# Altium PCB Main_Layout.PcbDoc
Units mil, origin at the board's own origin, x right, y up, seen from the top; angles counter-clockwise.
Board outline 1250 x 2200 mil, 2 copper layers (Top Layer, Bottom Layer), stack 62.8 mil thick; 25 components, 37 nets, 162 pads, 25 vias.
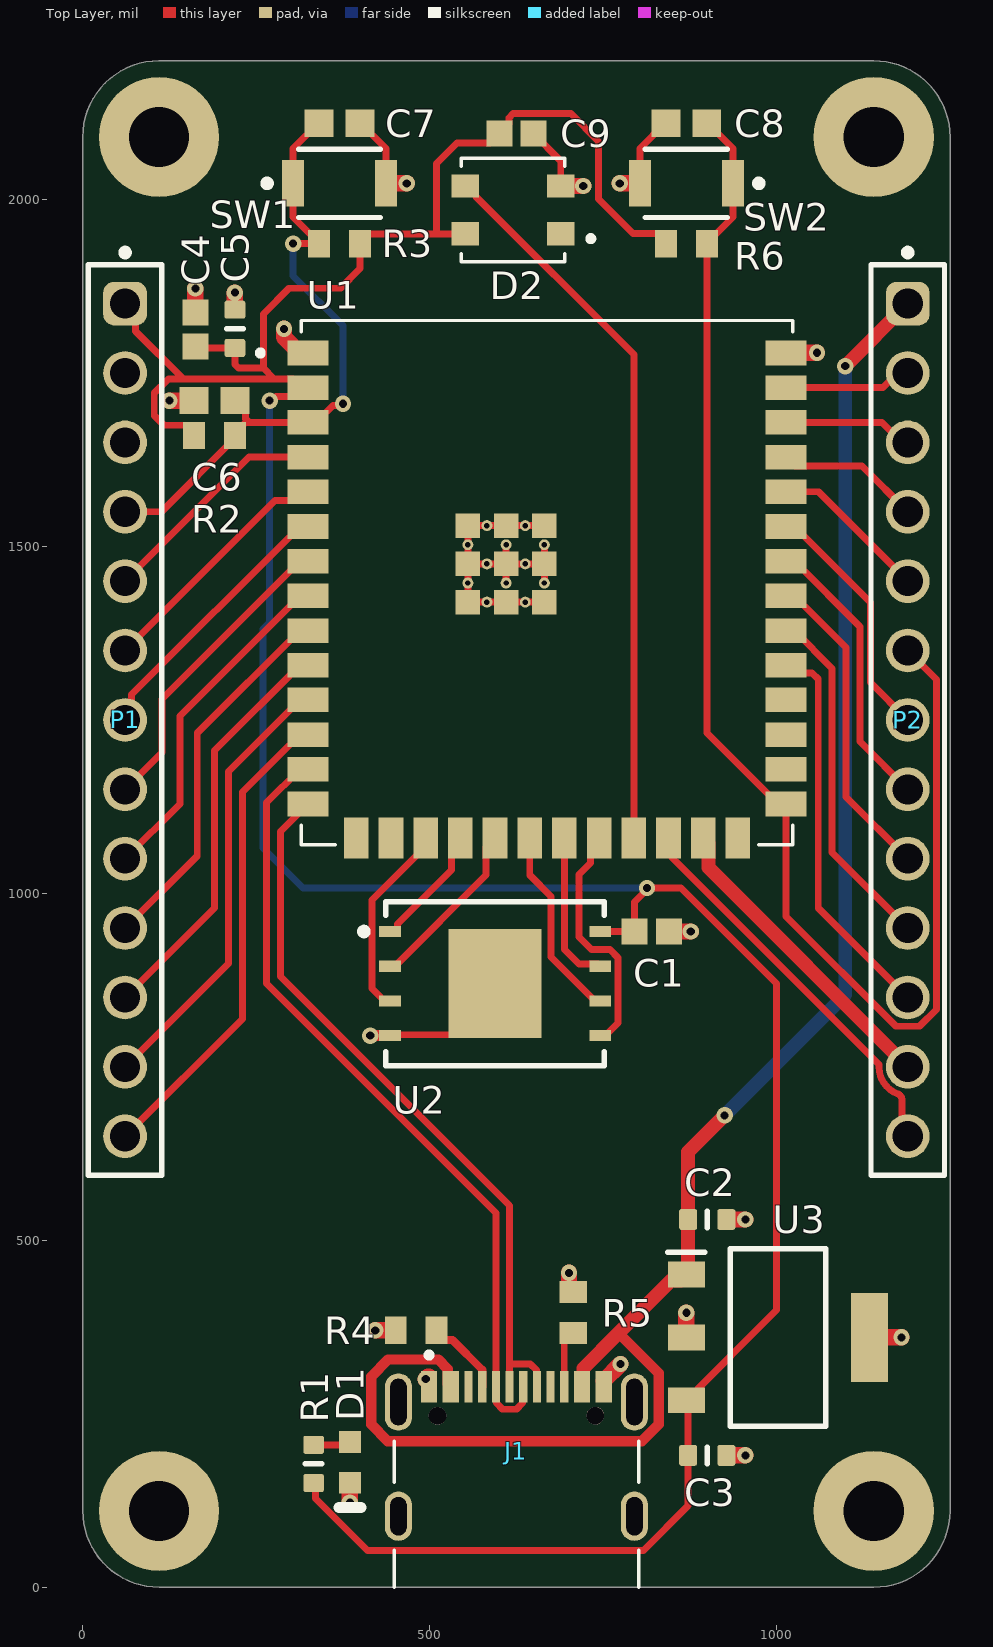
[diagram p0: Top Layer view]
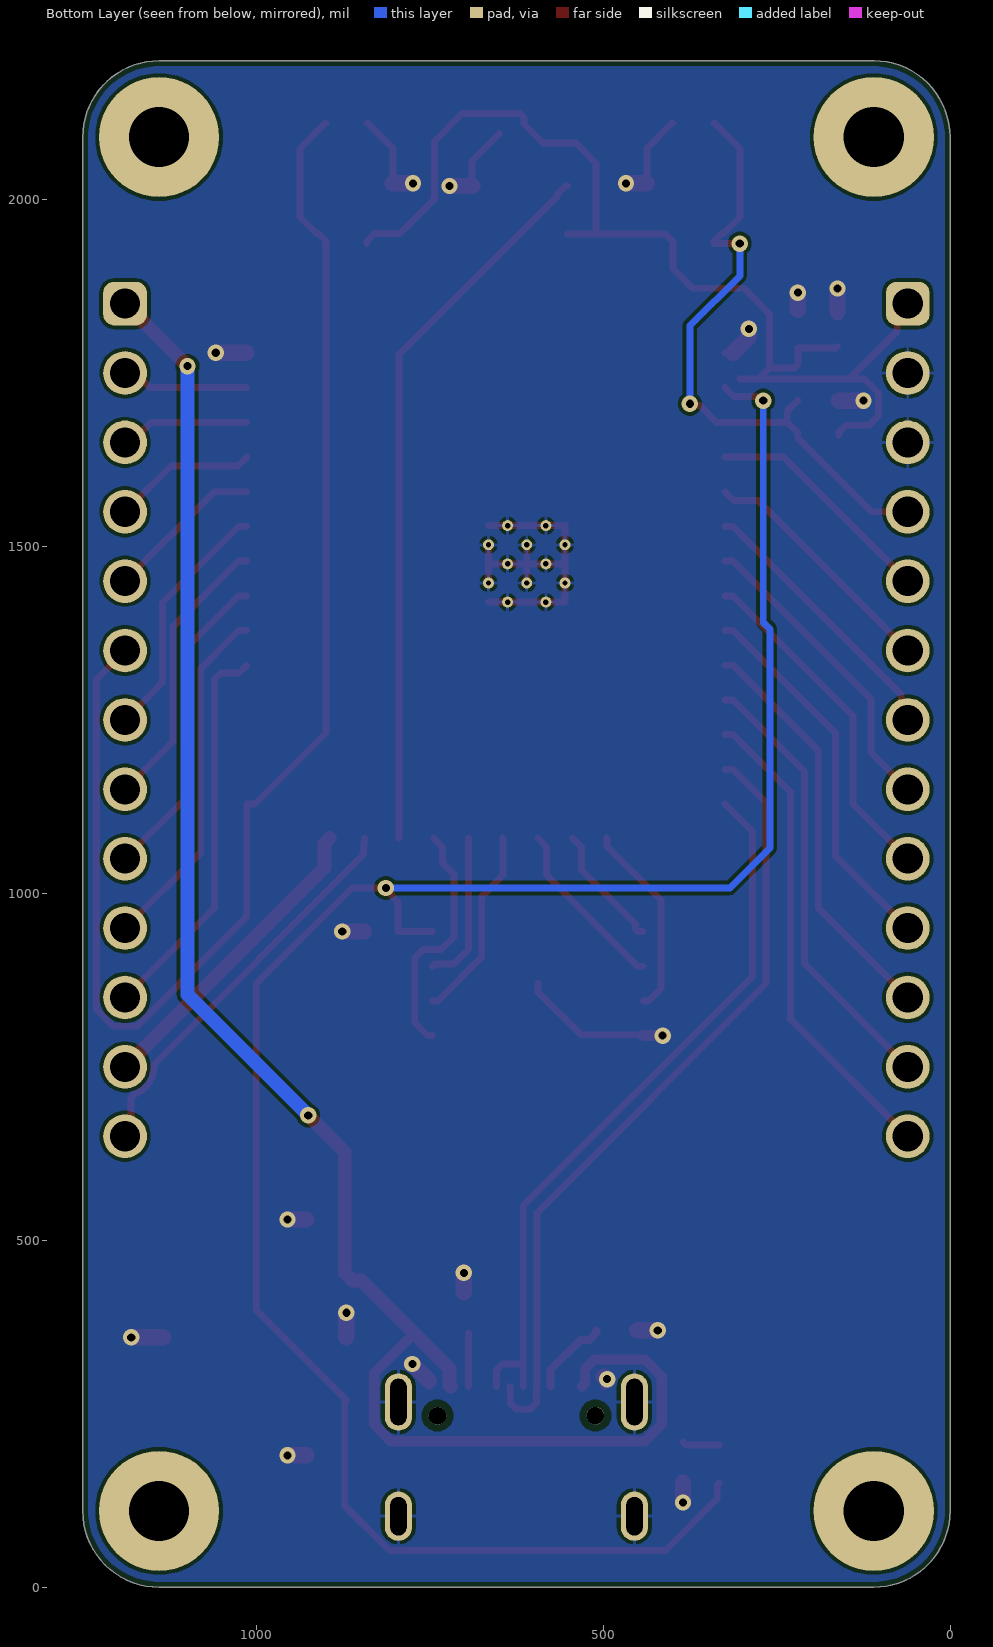
[diagram p1: Bottom Layer view, seen from below]
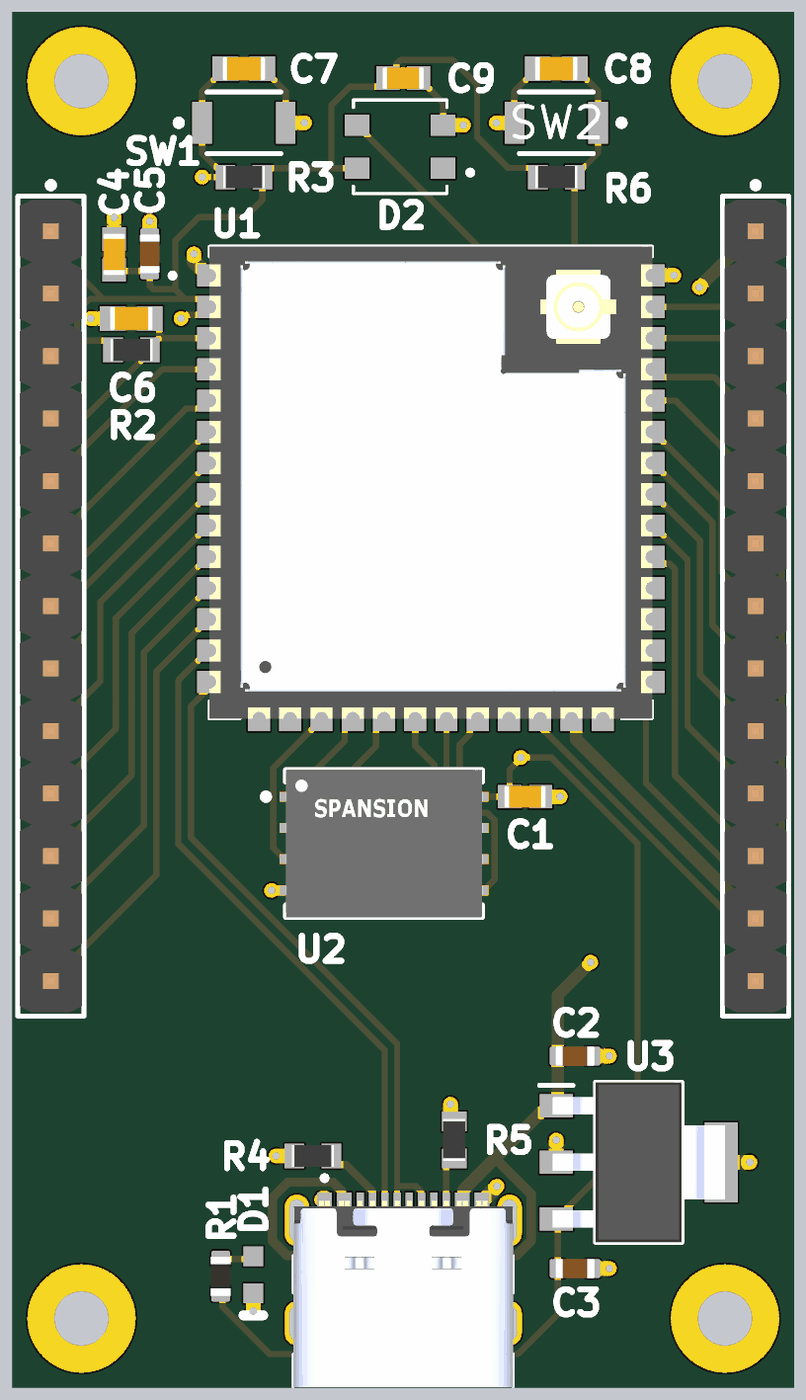
[diagram p2: 3D render of the assembled board from above, using the file's embedded part models]

## Layer stack, top to bottom
Top Solder: solder mask 0.4, Solder Resist, Dk 3.8
Top Layer: signal copper 1.4
Dielectric 1: dielectric 60, FR-4, Dk 4.5
Bottom Layer: signal copper 1.4
Bottom Solder: solder mask 0.4, Solder Resist, Dk 3.8

## Board outline
0,110 0,2090 cw(c110,2090) 110,2200 1140,2200 cw(c1140,2090) 1250,2090 1250,110 cw(c1140,110) 1140,0 110,0 cw(c110,110)

## Design rules (kind name [scope] priority, off if disabled: settings)
BoardOutlineClearance [All] p1: gap=7.87 ignorepadtopadclearanceinfootprint=FALSE
Clearance [All] p1: gap=5 ignorepadtopadclearanceinfootprint=FALSE except(9.84: Arc-Hole Track-Hole SMDPad-Hole THPad-Hole Via-Hole Fill-Hole Poly-Hole Region-Hole Text-Hole)
ComponentClearance [All] p1: gap=5 collisioncheckmode=3 verticalgap=5 showdistances=TRUE
DiffPairsRouting [All] p1: maxlimit=10 minlimit=5 mostfreqgap=5 toplayer_minwidth=5 toplayer_maxwidth=1000 toplayer_prefwidth=5 bottomlayer_minwidth=5 bottomlayer_maxwidth=1000 bottomlayer_prefwidth=5 maxuncoupledlength=500
Height [All] p1: minheight=0 maxheight=71497.94 prefheight=500
HoleSize [All] p1: absolutevalues=TRUE maxlimit=248.03 minlimit=11.81 maxpercent=80.000 minpercent=20.000
HoleToHoleClearance [All] p1: gap=9.84 allowstackedmicrovias=FALSE
MinimumAnnularRing [All] p1: minimumring=3
MinimumSolderMaskSliver [All] p1: minsoldermaskwidth=0
PlaneClearance [All] p1: clearance=5
PlaneConnect PlaneConnectPowerPads [InPadClass('PowerPads')] p1: planeconnectstyle=Direct reliefexpansion=20 reliefentries=4 reliefconductorwidth=10 reliefairgap=10
PlaneConnect [All] p2: pad.planeconnectstyle=Relief pad.reliefexpansion=11.81 pad.reliefentries=4 pad.reliefconductorwidth=5 pad.reliefairgap=5 via.planeconnectstyle=Direct via.reliefexpansion=11.81 via.reliefentries=4 via.reliefconductorwidth=5 via.reliefairgap=5
PolygonConnect PolygonConnectPowerPads [All vs (InPadClass('PowerPads'))] p1: connectstyle=Direct reliefconductorwidth=10 reliefentries=4 polygonreliefangle="90 Angle" airgapwidth=10
PolygonConnect [All] p2: thpad.connectstyle=Relief thpad.reliefconductorwidth=5 thpad.reliefentries=4 thpad.polygonreliefangle="90 Angle" thpad.airgapwidth=5 smdpad.connectstyle=Relief smdpad.reliefconductorwidth=5 smdpad.reliefentries=4 smdpad.polygonreliefangle="90 Angle" smdpad.airgapwidth=5 via.connectstyle=Direct via.reliefconductorwidth=5 via.reliefentries=4 via.polygonreliefangle="90 Angle" via.airgapwidth=5
RoutingVias [All] p1: holewidth=11.81 width=23.62 viastyle="Through Hole" minholewidth=11.81 minwidth=23.62 maxholewidth=23.62 maxwidth=259.84
SilkToSilkClearance [All] p1: silktosilkclearance=0
SilkToSolderMaskClearance [IsPad] p1: minsilkscreentomaskgap=5 clearancetoexposedcopper=TRUE
SolderMaskExpansion [All] p1: expansion=2.95 istentingtop=FALSE
SupplyNets "Schematic Supply Nets_2" [InNet('VBUS')] p1: voltage=0.000
SupplyNets "Schematic Supply Nets_1" [InNet('GND')] p2: voltage=0.000
SupplyNets "Schematic Supply Nets" [InNet('+3.3V')] p3: voltage=0.000
Width [All] p1: maxlimit=1000 minlimit=5 preferedwidth=5 minimp=50.000000 maximp=50.000000 favimp=50.000000
20 further rules are at their usual default settings.

## Classes and differential pairs
component class Main_Schematic: C1 C2 C3 C4 C5 C6 C7 C8 C9 D1 D2 P1 P2 R1 R3 R4 R5 R6 SW1 SW2 U2 U3

## Components (designator, comment, footprint, x,y, rotation, side; value= is the part's Value field where it differs from the comment)
C1 "Capacitor 100 nF +/-10% 50 V 0603" CAPC1608X90X40NL10T20 820,945 r180 top value=100nF
C2 "Capacitor 10µF +/-20% 10V 0603" CAPC0603(1608)100_L 900,530 r0 top value=10µF
C3 "Capacitor 10µF +/-20% 10V 0603" CAPC0603(1608)100_L 900,190 r0 top value=22µF
C4 "Capacitor 100 nF +/-10% 50 V 0603" CAPC1608X90X40NL10T20 162.29,1812.71 r90 top value=100nF
C5 "Capacitor 22µF +/-20% 10V 0603" CAPC0603(1608)100_L 219.29,1813.7 r90 top value=22µF
C6 "Capacitor 1 uF +/- 10% 16 V 0603" CAPC1608X94X35NL15T15 189.75,1710.29 r180 top value=1µF
C7 "Capacitor 1 uF +/- 10% 16 V 0603" CAPC1608X94X35NL15T15 370,2110 r0 top value=1µF
C8 "Capacitor 1 uF +/- 10% 16 V 0603" CAPC1608X94X35NL15T15 870,2110 r180 top value=1µF
C9 "Capacitor 100 nF +/-10% 50 V 0603" CAPC1608X90X40NL10T20 625,2095 r0 top value=100nF
D1 "LTST-C190GKT" LTST-C190GKT_V 385,180 r270 top
D2 "2659" 2659 620,1985 r180 top
J1 "UJ20-C-H-G-SMT-1-P16-TR" SAMESKY_UJ20-C-H-G-SMT-1-P16-TR 625,0 r0 top
P1 "61301311121" 61301311121 61,1250 r270 top
P2 "61301311121" 61301311121 1189,1250 r270 top
R1 "Resistor 120R +/-5 % 0603 0.1 W" RESC0603(1608)_L 332.76,177.7 r270 top value=120
R2 "Resistor 10k +/-1% 0603 100 mW" RESC1608X55X25ML10T15 190,1660 r180 top value=10k
R3 "Resistor 10k +/-1% 0603 100 mW" RESC1608X55X25ML10T15 370,1936.5 r0 top value=10k
R4 "Resistor 4k7 +/-1% 0603 100 mW" RESC1608X55X25ML10T15 480.51,370.16 r180 top value=5.1k
R5 "Resistor 4k7 +/-1% 0603 100 mW" RESC1608X55X25ML10T15 706.69,395.75 r90 top value=5.1k
R6 "Resistor 10k +/-1% 0603 100 mW" RESC1608X55X25ML10T15 870,1936.5 r180 top value=10k
SW1 "B3U-1000P" OMRON-B3U-1000_V 370,2023.32 r0 top
SW2 "B3U-1000P" OMRON-B3U-1000_V 870,2023.32 r180 top
U1 "ESP32-S3-WROOM-1U-N16" XCVR_ESP32-S3-WROOM-1U-N16 669.17,1447.72 r0 top
U2 "S25HL512TDPNHI010" SON127P800X600X80-9N-V1 594.17,870 r0 top
U3 "AZ1117CH2-3.3TRG1" SOT230P700X180-4N 1001.89,360 r0 top

## Footprints (in the part's own frame and the unit in brackets; to place one, negate y for a bottom-side part, rotate by r counter-clockwise, add the part's x,y. Pads: shape width x height; smd on the part's side, far side on the other; paste and mask are expansions set on the pad)
2659 [mm]
  rect 1x0.85 smd: 1(-1.75,0.875) 2(-1.75,-0.875) 3(1.75,-0.875) 4(1.75,0.875)
  silkscreen extent -2.95,-1.9 1.9,1.9
61301311121 [mm] "Pin Header, pitch 2.54 mm, THT, Vertical, single row, 13p"
  rrect50% 1.6x1.6 hole 1.1: 1(-15.24,0)
  round 1.6 hole 1.1: 2(-12.7,0) 3(-10.16,0) 4(-7.62,0) 5(-5.08,0) 6(-2.54,0) 7(0,0) 8(2.54,0) 9(5.08,0) 10(7.62,0) 11(10.16,0) 12(12.7,0) 13(15.24,0)
  silkscreen extent -17.23,-1.35 16.66,1.35, body extent -16.51,-1.27 16.51,1.27, height 8.57
CAPC0603(1608)100_L [mm] "Chip Capacitor, Body 1.6x0.8mm, Height 1.0mm, IPC High Density"
  rrect25% 0.66x0.76 smd: 1(-0.7,0) 2(0.7,0)
  silkscreen extent 0,-0.3 0,0.3, body extent -0.8,-0.4 0.8,0.4, height 0.95
CAPC1608X90X40NL10T20 [mm] "Chip Capacitor, 2-Leads, Body 1.70x0.90mm, IPC Medium Density"
  rect 0.95x0.95 smd: 1(-0.625,0) 2(0.625,0)
  body extent -0.85,-0.45 0.85,0.45, height 0.9
CAPC1608X94X35NL15T15 [mm] "Chip Capacitor, 2-Leads, Body 1.75x0.96mm, IPC Medium Density"
  rect 1.05x1 smd: 1(-0.75,0) 2(0.75,0)
  body extent -0.87,-0.48 0.87,0.48, height 0.94
LTST-C190GKT_V [mm] "SMD, 2-Leads, Body 1.6x0.8mm"
  rect 0.8x0.8 smd: 1(-0.75,0) 2(0.75,0)
  silkscreen extent 1.65,-0.4 1.65,0.4, body extent -0.8,-0.4 0.8,0.4, height 0.9
OMRON-B3U-1000_V [mm] "SMD, 2-Leads, Body 3x2.5mm"
  rect 0.8x1.7 smd: 1(-1.7,0) 2(1.7,0)
  silkscreen extent -2.77,-1.25 1.5,1.25, body extent -1.5,-1.25 1.5,1.25, height 1.75
RESC0603(1608)_L [mm] "Chip Resistor, Body 1.6x0.8mm, IPC High Density"
  rrect25% 0.66x0.76 smd: 1(-0.7,0) 2(0.7,0)
  silkscreen extent 0,-0.3 0,0.3, body extent -0.8,-0.4 0.8,0.4, height 0.45
RESC1608X55X25ML10T15 [mm] "Chip Resistor, 2-Leads, Body 1.70x0.90mm, IPC Low Density"
  rect 0.8x1 smd: 1(-0.75,0) 2(0.75,0)
  body extent -0.85,-0.45 0.85,0.45, height 0.55
SAMESKY_UJ20-C-H-G-SMT-1-P16-TR [mm]
  rect 0.6x1.15 smd: A1_B12(-3.2,7.345) A4_B9(-2.4,7.345) B1_A12(3.2,7.345) B4_A9(2.4,7.345)
  rect 0.3x1.15 smd: A5(-1.25,7.345) A6(-0.25,7.345) A7(0.25,7.345) A8(1.25,7.345) B5(1.75,7.345) B6(0.75,7.345) B7(-0.75,7.345) B8(-1.75,7.345)
  oval 1x2.1 hole 0.6 slot 1.7 at 90 deg: SH1(-4.32,6.78) SH2(4.32,6.78)
  oval 1x1.8 hole 0.6 slot 1.4 at 90 deg: SH3(-4.32,2.6) SH4(4.32,2.6)
  round 0.65 hole 0.65 unplated: ""(-2.89,6.28) ""(2.89,6.28)
  silkscreen extent -4.47,0 4.47,8.6, body extent -4.47,0 4.47,7.6, height 3.31
SON127P800X600X80-9N-V1 [mm] "SON,1.27mm,pitch;8 pin,8.00mm W X 6.00mm L X 0.80mm H body (w/thermal tab)"
  rect 0.8x0.41 smd paste-0.02 mask+0: 1(-3.85,1.905) 2(-3.85,0.635) 3(-3.85,-0.635) 4(-3.85,-1.905) 5(3.85,-1.905) 6(3.85,-0.635) 7(3.85,0.635) 8(3.85,1.905)
  rect 3.4x4 smd paste-1.7 mask+0: 9(0,0)
  silkscreen extent -4.92,-3 4,3, body extent -4,-3 4,3, height 0.8
SOT230P700X180-4N [mm]
  rect 1.35x0.95 smd: 1(-3.35,2.3) 2(-3.35,0) 3(-3.35,-2.3)
  rect 1.35x3.25 smd: 4(3.35,0)
  silkscreen extent -4.03,-3.25 1.75,3.25, body extent -3.5,-3.25 3.5,3.25, height 1.65
XCVR_ESP32-S3-WROOM-1U-N16 [mm]
  rect 1.5x0.9 smd: 1(-8.75,8.41) 2(-8.75,7.14) 3(-8.75,5.87) 4(-8.75,4.6) 5(-8.75,3.33) 6(-8.75,2.06) 7(-8.75,0.79) 8(-8.75,-0.48) 9(-8.75,-1.75) 10(-8.75,-3.02) 11(-8.75,-4.29) 12(-8.75,-5.56) 13(-8.75,-6.83) 14(-8.75,-8.1) 27(8.75,-8.1) 28(8.75,-6.83) 29(8.75,-5.56) 30(8.75,-4.29) 31(8.75,-3.02) 32(8.75,-1.75) 33(8.75,-0.48) 34(8.75,0.79) 35(8.75,2.06) 36(8.75,3.33) 37(8.75,4.6) 38(8.75,5.87) 39(8.75,7.14) 40(8.75,8.41)
  rect 0.9x1.5 smd: 15(-6.985,-9.35) 16(-5.715,-9.35) 17(-4.445,-9.35) 18(-3.175,-9.35) 19(-1.905,-9.35) 20(-0.635,-9.35) 21(0.635,-9.35) 22(1.905,-9.35) 23(3.175,-9.35) 24(4.445,-9.35) 25(5.715,-9.35) 26(6.985,-9.35)
  rect 0.9x0.9 smd: 41_1(-2.9,2.09) 41_2(-1.5,2.09) 41_3(-0.1,2.09) 41_4(-2.9,0.69) 41_5(-1.5,0.69) 41_6(-0.1,0.69) 41_7(-2.9,-0.71) 41_8(-1.5,-0.71) 41_9(-0.1,-0.71)
  round 0.4 hole 0.2 mask+0: 41_10(-2.2,2.09) 41_11(-0.8,2.09) 41_12(-2.9,1.39) 41_13(-1.5,1.39) 41_14(-0.1,1.39) 41_15(-2.2,0.69) 41_16(-0.8,0.69) 41_17(-2.9,-0.01) 41_18(-1.5,-0.01) 41_19(-0.1,-0.01) 41_20(-2.2,-0.71) 41_21(-0.8,-0.71)
  silkscreen extent -10.6,-9.6 9,9.6, body extent -9,-9.6 9,9.6, height 3.35

## Part data
C1 C4 C9: library part CMP-001-00017-6, "Chip Capacitor, 100 nF, +/- 10%, 50 V, 0603 (1608 Metric)", Capacitor Type=Ceramic, Case/Package=0603, Max Operating Temperature=125°C, Min Operating Temperature=-55°C, Tolerance=10%, Voltage Rating=50V, Mounting Technology=SM, Pins=2, RoHS Compliant=True
C2 C3: library part CMP-001-00075-4, "Chip Capacitor, 10µF +/-20%, 10V, 0603, Thickness 1 mm", Case/Package=0603, Max Operating Temperature=85°C, Min Operating Temperature=-55°C, Tolerance=10%, Voltage Rating=10V, Mounting Technology=SMT, Pins=2
C5: library part CMP-001-00075-4, "Chip Capacitor, 22µF +/-20%, 10V, 0603, Thickness 1 mm", Case/Package=0603, Max Operating Temperature=85°C, Min Operating Temperature=-55°C, Tolerance=10%, Voltage Rating=10V, Mounting Technology=SMT, Pins=2
C6 C7 C8: library part CMP-001-00003-6, "Chip Capacitor, 1 uF, +/- 10%, 16 V, 0603 (1608 Metric)", Capacitor Type=Ceramic, Case/Package=0603, Max Operating Temperature=125°C, Min Operating Temperature=-55°C, Tolerance=10%, Voltage Rating=16V, Mounting Technology=SM, Pins=2, RoHS Compliant=True
D1: library part CMP-007-00022-2, "LED Uni-Color Green, 100 mW, 30 mA, -55 to 85 degC, 2-Pin SMD, RoHS, Tape and Reel", Case/Package=0603, Colour=Green, Forward Current=20mA, Forward Voltage=2.1V, Manufacturer=Lite-On, Max Operating Temperature=85°C, Min Operating Temperature=-55°C, Package Description="2-Pin Surface Mount Device, Body 1.6 x 0.8 mm", Package Quantity=3000, Package Reference=C190GKT, Power=100mW, Datasheet URL=http://datasheet.octopart.com/LTST-C190GKT-Lite-On-datasheet-158530.pdf, Datasheet Version=Dec-06, Illumination Colour=Green, Lens Style=Clear, Luminous Intensity=6mcd, Manufacturer URL=http://www.us.liteon.com/, Mounting Technology=SM, Nominal Vf=2.1V, Packaging=TapeandReel, Pins=2, RoHS Compliant=True, Viewing Angle=130degrees
D2: "20 AWG Hook-Up Wire 26/34 White 300V 40.00' _12.19m_", Package="TQFP-32 Adafruit Industries", Digi-Key_Part_Number=2183-2659-ND, Digi-Key_Purchase_URL=https://www.digikey.com/product-detail/en/pololu-corporation/2659/2183-2659-ND/10451102?utm_source=snapeda&utm_medium=aggregator&utm_campaign=symbol, MF="Adafruit Industries", MP=2659, SnapEDA_Link=https://www.snapeda.com/parts/2659/Adafruit%20Industries%20LLC/view-part/548522/?ref=snap
J1: library part CMP-002-00071-1, "USB-C (USB TYPE-C) USB 2.0 Receptacle Connector 24 (16+8 Dummy) Position Surface Mount, Right Angle; Through Hole", Case/Package=None, Check_prices=https://au.mouser.com/ProductDetail/Same-Sky/UJ20-C-H-G-SMT-1-P16-TR?qs=IKkN%2F947nfA6nby92vSKkw%3D%3D, Component Type=Standard, Design Item ID=UJ20-C-H-G-SMT-1-P16-TR, MF="Same Sky", MP=UJ20-C-H-G-SMT-1-P16-TR, Pins=16, SnapEDA_Link=https://www.snapeda.com/parts/UJ20-C-H-G-SMT-1-P16-TR/Same+Sky/view-part/?ref=snap, Source=UJ20-C-H-G-SMT-1-P16-TR.SchLib
P1 P2: library part CMP-002-00072-1, "Header, 2.54 Mm, Pin Header, 13 Pins, Single Row, 3A, Wr-phd Series", Max Operating Temperature=105°C, Min Operating Temperature=-40°C, Connector Type="Male Pin", Gender=Male, Mounting Technology="Through Hole", Pins=13
R1: library part CMP-009-00176-3, "Chip Resistor, 120 Ohms, +/-5 %, 0.1 W, -55 to 155 degC, 0603", Case/Package=0603, Max Operating Temperature=155°C, Min Operating Temperature=-55°C, Power=100mW, Tolerance=5%, Pins=2
R2 R3 R6: library part CMP-009-00017-5, "Chip Resistor, 10 KOhm, +/- 1%, 01 W, -55 to 155 degC, 0603 (1608 Metric)", Case/Package=0603, Max Operating Temperature=155°C, Min Operating Temperature=-55°C, Power=100mW, Tolerance=1%, Voltage Rating=50V, Mounting Technology=SM, Pins=2, RoHS Compliant=True
R4 R5: library part CMP-009-00031-5, "Chip Resistor, 4.7 KOhm, +/- 1%, 0.1 W, -55 to 155 degC, 0603 (1608 Metric)", Case/Package=0603, Max Operating Temperature=155°C, Min Operating Temperature=-55°C, Power=100mW, Tolerance=1%, Mounting Technology=SM, Pins=2, RoHS Compliant=True
SW1 SW2: library part CMP-011-00000-2, "Tactile Switch, SPST-NO, 0.05 A, 12 V, -25 to 70 degC, 2-Pin SMD, RoHS, Tape and Reel", Case/Package=B3U-1000, Contact Current Rating=50mA, IP Rating=IP40, Manufacturer="Omron Electronic Components", Max Contact Resistance=100mohm, Max Operating Temperature=70°C, Max Voltage Rating (DC)=12V, Min Operating Temperature=-25°C, Operating Force=153gf, Package Description="2-Pin Surface Mount Device, Body 3 x 2.5 mm", Package Quantity=3500, Resistance=0.1Ohm, Contact Material=Silver, Current Rating=50mA, Datasheet URL=http://www.omron.com/ecb/products/pdf/en-b3u.pdf, Datasheet Version=Jan-15, Manufacturer URL=http://www.omron.com/, Max Current Rating=50mA, Mounting Technology=SM, Package Reference=B3U-1000, Packaging=TapeandReel, RoHS Compliant=True, Throw Configuration=SPST, Voltage Rating=12V, Voltage Rating (DC)=12V
U1: library part CMP-006-000000-1, "Bluetooth, WiFi 802.11b/g/n, Bluetooth v5.0 Transceiver Module 2.4GHz Antenna Not Included, U.FL Surface Mount", Package=None, Check_prices=https://au.mouser.com/ProductDetail/Espressif-Systems/ESP32-S3-WROOM-1U-N16?qs=Li%252BoUPsLEntAI1ynUyotnA%3D%3D, Component Type=Standard, Design Item ID=ESP32-S3-WROOM-1U-N16, MF="Espressif Systems", MP=ESP32-S3-WROOM-1U-N16, Pin Count=49, SnapEDA_Link=https://www.snapeda.com/parts/ESP32-S3-WROOM-1U-N16/Espressif+Systems/view-part/?ref=snap, Source=ESP32-S3-WROOM-1U-N16.SchLib
U2: library part CMP-031-00008-2, "512 Mb, SEMPER Flash Quad SPI", Case/Package=PG-WSON-8-805, Manufacturer="Infineon Technologies", Component Type=Standard, Design Item ID=S25HL512TDPNHI010, Manufacturer Order Number=S25HL512TDPNHI010, Pins=9, Source=S25HL512TDPNHI010.SchLib
U3: "Linear Voltage Regulator IC Positive Fixed 1 Output 1A SOT-223-3", Package="SOT-223 Diodes Inc.", Availability="In Stock", Check_prices=https://www.snapeda.com/parts/AZ1117CH2-3.3TRG1/Diodes+Inc./view-part/?ref=eda, MF="Diodes Inc.", MP=AZ1117CH2-3.3TRG1, Price=None, Purchase-URL=https://pricing.snapeda.com/search?q=AZ1117CH2-3.3TRG1&ref=eda, SnapEDA_Link=https://www.snapeda.com/parts/AZ1117CH2-3.3TRG1/Diodes+Inc./view-part/?ref=snap

## Free pads (board coordinates)
  round 173.23 hole 86.61 unplated: 1(110,2090) 2(1140,2090) 3(110,110) 4(1140,110)

## Via types
v1: diameter 23.62, hole 11.81, Top Layer to Bottom Layer, 25 vias

## Nets (pads, with @x,y where several pads share a name; then routed paths per layer and width w, separated by ;. In a path a pad name is that pad's centre, name@x,y a point inside that pad or via, vN(x,y) a via of type N, cw(c..) or ccw(c..) an arc to the next point about the centre after c; other vN are vias at no path point)
+3.3V: C1.2 C3.1 C4.1 C5.1 C9.1 D2.4 P1.1 R1.2 R2.2 R3.2 R6.2 U1.2 U2.8 U3.3 | length 4716.2
  Top Layer w10: P1.1 76.17,1834.83 76.17,1810.19 144.58,1741.79 144.58,1741.54 ; R2.2 160.47,1663.94 149.72,1674.69 116.98,1674.69 103.02,1688.65 103.02,1721.2 123.35,1741.54 144.58,1741.54 ; C4.1 164.26,1786.14 C5.1 219.28,1762.33 224.58,1757.03 260.23,1757.03 ; v1(269.25,1710.29) 272.93,1710.29 278.75,1716.1 311.97,1716.1 U1.2 ; U1.2@303.07,1741.54 275.73,1741.54 ; R1.2 335.59,147.3 335.59,128 410.44,53.15 808.15,53.15 872.44,117.44 C3.1 872.44,267.01 U3.3 1000,399.45 1000,870 862.2,1007.8 v1(813.19,1007.8) 813.19,1005.47 795.39,987.67 C1.2 U2.8 ; D2.4 510,1950.55 ; R6.2 840.47,1940.44 829.72,1951.19 792.99,1951.19 743.24,2000.94 743.24,2083.97 703.5,2123.7 619.95,2123.7 614.09,2117.84 614.09,2108.7 C9.1 586.69,2081.3 539.13,2081.3 510,2052.17 510,1950.55 ; 144.58,1741.54 275.73,1741.54 ; 260.23,1757.03 275.73,1741.54 ; 260.23,1757.03 260.23,1835.3 297.11,1872.18 371.39,1872.18 399.53,1900.32 R3.2 399.53,1939.8 410.28,1950.55 510,1950.55
  Bottom Layer w10: v1(269.25,1710.29) 269.25,1390.7 259.72,1381.18 259.72,1065.28 317.2,1007.8 v1(813.19,1007.8)
BOOT: C8.1 P2.6 R6.1 SW2.1 U1.27 | length 2053.7
  Top Layer w10: R6.1 899.53,1231.14 1001.85,1128.82 U1.27 1013.66,966.65 1171.81,808.5 1206.19,808.5 1230.5,832.81 1230.5,1308.5 P2.6 ; R6.1@899.53,1940.44 910.28,1951.19 913.26,1951.19 936.93,1974.86 SW2.1 936.93,2073.58 900.51,2110 C8.1
EN: C6.1 C7.1 P1.4 R2.1 R3.1 SW1.1 U1.3 | length 928.4
  Top Layer w10: P1.4 113.46,1550 219.53,1656.06 219.53,1663.94 234.41,1678.82 239.92,1678.82 ; C6.1 219.97,1710.29 234.65,1695.6 234.65,1684.09 239.92,1678.82 ; v1(303.07,1936.5) R3.1 340.47,1940.44 329.72,1951.19 326.74,1951.19 303.07,1974.86 SW1.1 303.07,2073.58 339.49,2110 C7.1 ; v1(375,1705.55) 372.39,1702.94 360.62,1702.94 336.5,1678.82 239.92,1678.82
  Bottom Layer w10: v1(303.07,1936.5) 303.07,1890.12 375,1818.19 v1(375,1705.55)
GND: C1.1 C2.2 C3.2 C4.2 C5.2 C6.2 C7.2 C8.2 C9.2 D1.2 D2.2 J1.A1_B12 J1.B1_A12 J1.SH1 J1.SH2 J1.SH3 J1.SH4 P1.2 P1.3 R4.2 R5.2 SW1.2 SW2.2 U1.1 U1.40 U1.41_1 U1.41_2 U1.41_3 U1.41_4 U1.41_5 U1.41_6 U1.41_7 U1.41_8 U1.41_9 U1.41_10 U1.41_11 U1.41_12 U1.41_13 U1.41_14 U1.41_15 U1.41_16 U1.41_17 U1.41_18 U1.41_19 U1.41_20 U1.41_21 U2.4 U2.9 U3.2 U3.4 | length 1669.5
  Top Layer w10: U1.1@312.87,1778.82 U1.1 ; C7.2 400.51,2110 436.93,2073.58 SW1.2 ; U2.4 443.86,796.26 532.24,796.26 594.17,858.19 U2.9 ; J1.A1_B12 J1.A1_B12@499.02,303.15 ; U1.41_18 U1.41_5 ; U1.41_13 U1.41_5 ; C9.2 688.9,2055.71 D2.2 ; U1.41_9 U1.41_21 U1.41_8 U1.41_20 U1.41_7 U1.41_17 U1.41_4 ; U1.41_19 U1.41_6 ; U1.41_14 U1.41_6 ; U1.41_3 U1.41_11 U1.41_2 U1.41_10 U1.41_1 U1.41_12 U1.41_4 ; J1.B1_A12 J1.B1_A12@750.98,297.64 ; SW2.2 803.07,2073.58 839.49,2110 C8.2 ; U1.40 U1.40@1014.14,1779.3 ; U1.41_4 U1.41_15 U1.41_5 ; U1.41_5 U1.41_16 U1.41_6
  Top Layer w16.14: v1(414.25,795) U2.4
  Top Layer w23.62: v1(124.83,1710.29) C6.2 ; C4.2 v1(162.29,1871.8) ; C5.2 v1(219.29,1865.86) ; v1(289.99,1813.51) 289.99,1801.7 U1.1@312.87,1778.82 ; v1(385,122.16) D1.2 ; v1(421.39,370.16) R4.2 ; SW1.2 v1(467,2023.32) ; v1(494.35,300) 497.5,303.15 J1.A1_B12@499.02,303.15 ; D2.2 v1(721.43,2019.45) ; R5.2@700.71,425.28 v1(700.71,452.99) ; J1.B1_A12@750.98,297.64 v1(775,321.65) ; v1(774,2023.32) SW2.2 ; C1.1 v1(876.15,945) ; U3.2 v1(870,395.48) ; C3.2 v1(955,190) ; C2.2 v1(955,530) ; U1.40@1014.14,1779.3 v1(1058.27,1779.3) ; U3.4 v1(1180,360)
IO1: P2.2 U1.39 | length 184.1
  Top Layer w10: U1.39 1153.48,1728.82 1174.66,1750 P2.2
IO2: P2.3 U1.38 | length 187.3
  Top Layer w10: U1.38 1152.06,1678.82 1180.88,1650 P2.3
IO4: P1.5 U1.4 | length 337.8
  Top Layer w10: P1.5 239.82,1628.82 U1.4
IO5: P1.6 U1.5 | length 358.5
  Top Layer w10: P1.6 277.1,1566.1 311.97,1566.1 U1.5
IO6: P1.7 U1.6 | length 395
  Top Layer w10: P1.7 70.41,1259.41 70.41,1286.35 312.87,1528.82 U1.6
IO7: P1.8 U1.7 | length 445
  Top Layer w10: P1.8 113.95,1202.95 113.95,1279.9 312.87,1478.82 U1.7
IO8: P1.13 U1.12 | length 695
  Top Layer w10: P1.13 230,819 230,1145.94 312.87,1228.82 U1.12
IO9: U1.17 U2.3 | length 281.8
  Top Layer w10: U2.3 434.92,845 416.85,863.07 416.85,990.47 494.17,1067.8 U1.17
IO10: U1.18 U2.1 | length 181.2
  Top Layer w10: U2.1 450.28,945 453.35,948.07 453.35,955.75 531.46,1033.86 531.46,1066.89 U1.18
IO11: U1.19 U2.2 | length 251.9
  Top Layer w10: U2.2 450.28,895 581.46,1026.18 581.46,1066.89 U1.19
IO12: U1.20 U2.6 | length 281.2
  Top Layer w10: U1.20 644.17,1026.18 675,995.35 675,908.07 738.07,845 U2.6
IO13: U1.21 U2.7 | length 222.2
  Top Layer w10: U1.21 694.17,918.9 715,898.07 742.68,898.07 U2.7
IO14: U1.22 U2.5 | length 350.7
  Top Layer w10: U1.22 731.47,1066.9 731.47,1043.85 715,1027.38 715,937.28 733.39,918.9 759.81,918.9 771.5,907.21 771.5,813.07 753.43,795 U2.5
IO15: P1.9 U1.8 | length 495
  Top Layer w10: P1.9 140,1129 140,1255.94 312.87,1428.82 U1.8
IO16: P1.10 U1.9 | length 545
  Top Layer w10: P1.10 165,1054 165,1230.94 312.87,1378.82 U1.9
IO17: P1.11 U1.10 | length 595
  Top Layer w10: P1.11 190,979 190,1205.94 312.87,1328.82 U1.10
IO18: P1.12 U1.11 | length 645
  Top Layer w10: P1.12 210,899 210,1175.94 312.87,1278.82 U1.11
IO21: D2.3 U1.23 | length 1042.3
  Top Layer w10: D2.3 554.06,2019.45 565.79,2007.72 565.79,2004.76 794.17,1776.38 U1.23
IO38: P2.11 U1.31 | length 566.9
  Top Layer w10: U1.31 1024.73,1317.75 1051.05,1317.75 1060,1308.8 1060,979 P2.11
IO39: P2.10 U1.32 | length 508.4
  Top Layer w10: U1.32 1025.47,1378.82 1080,1324.29 1080,1059 P2.10
IO40: P2.9 U1.33 | length 458.4
  Top Layer w10: U1.33 1025.47,1428.82 1100,1354.29 1100,1139 P2.9
IO41: P2.8 U1.34 | length 408.4
  Top Layer w10: U1.34 1025.47,1478.82 1120,1384.29 1120,1219 P2.8
IO42: P2.7 U1.35 | length 358.4
  Top Layer w10: U1.35 1025.47,1528.82 1135,1419.29 1135,1304 P2.7
IO47: P2.13 U1.24 | length 572.1
  Top Layer w10: U1.24 845.91,1055.08 1147.51,753.48 1147.5,750.05 ccw(c1189,750) 1174.33,711.18 cw(c1170.77,701.84) 1180.26,705.02 1180.77,703.47 P2.13@1180.77,658.23
  Top Layer w20: P2.13@1180.77,658.23 P2.13
IO48: P2.12 U1.25 | length 451.7
  Top Layer w20: U1.25 901.62,1072.16 901.62,1037.38 P2.12
NetD1_1: D1.1 R1.1 | length 54
  Top Layer w10: R1.1 380.73,205.26 D1.1
NetJ1_A5: J1.A5 R4.1 | length 115.8
  Top Layer w11.81: R4.1 510.04,366.22 519.88,356.38 532.86,356.38 575.79,313.45 J1.A5
NetJ1_B5: J1.B5 R5.1 | length 77
  Top Layer w10: J1.B5 R5.1@693.9,366.22
RXD0: P2.5 U1.36 | length 228.7
  Top Layer w10: U1.36 1060.18,1578.82 P2.5
TXD0: P2.4 U1.37 | length 208
  Top Layer w10: U1.37 1026.38,1616.1 1122.9,1616.1 P2.4
USB_D+: J1.A6 J1.B6 U1.14 | length 1059.3
  Top Layer w10: U1.14 285,1089.13 285,880 615.16,549.84 615.16,321.65 ; J1.A6 615.16,321.65 ; J1.B6 653.62,290.08 653.62,313.08 644.89,321.81 615.32,321.81 615.16,321.65
USB_D-: J1.A7 J1.B7 U1.13 | length 1151.5
  Top Layer w10: U1.13 312.87,1178.82 265,1130.94 265,870 595.47,539.53 J1.B7 596.38,288.27 596.38,265.27 605.11,256.54 625.21,256.54 633.94,265.27 633.94,288.27 J1.A7
VBUS: C2.1 J1.A4_B9 J1.B4_A9 P2.1 U3.1 | length 2575.2
  Top Layer w15: J1.A4_B9 526.2,293.48 526.2,314.11 512.1,328.22 440.16,328.22 415.55,303.61 415.55,234.78 439.7,210.63 805.95,210.63 830,234.68 830,308.59 772.37,366.22
  Top Layer w20: J1.B4_A9 721.3,290.98 721.3,315.15 772.37,366.22 848,441.85 861.3,441.85 872.44,452.99 C2.1 872.44,627.44 v1(925,680) ; v1(1099,1760) P2.1
  Bottom Layer w20: v1(925,680) 1099,854 v1(1099,1760)
pads on no net: D2.1 J1. J1.A8 J1.B8 U1.15 U1.16 U1.26 U1.28 U1.29 U1.30

## Polygon pours and split planes (outlines as drawn)
GND on Bottom Layer "GND_L02_P002" (solid, pour order 2): 0,110 0,2090 cw(c110,2090) 110,2200 1140,2200 cw(c1140,2090) 1250,2090 1250,110 cw(c1140,110) 1140,0 110,0 cw(c110,110)

## Text inside footprints (layer, text, board x,y; h text height)
J1: Mechanical 13 "PCB EDGE" at 829.72,7.87 h39.37